# Altium PCB PCB1.PcbDoc
Units mm, origin at the board's own origin, x right, y up, seen from the top; angles counter-clockwise.
Board outline 50.01 x 50 mm, 2 copper layers (Top Layer, Bottom Layer); 82 components, 66 nets, 325 pads, 69 vias.
Unrouted connection lines stored in the file: 78.
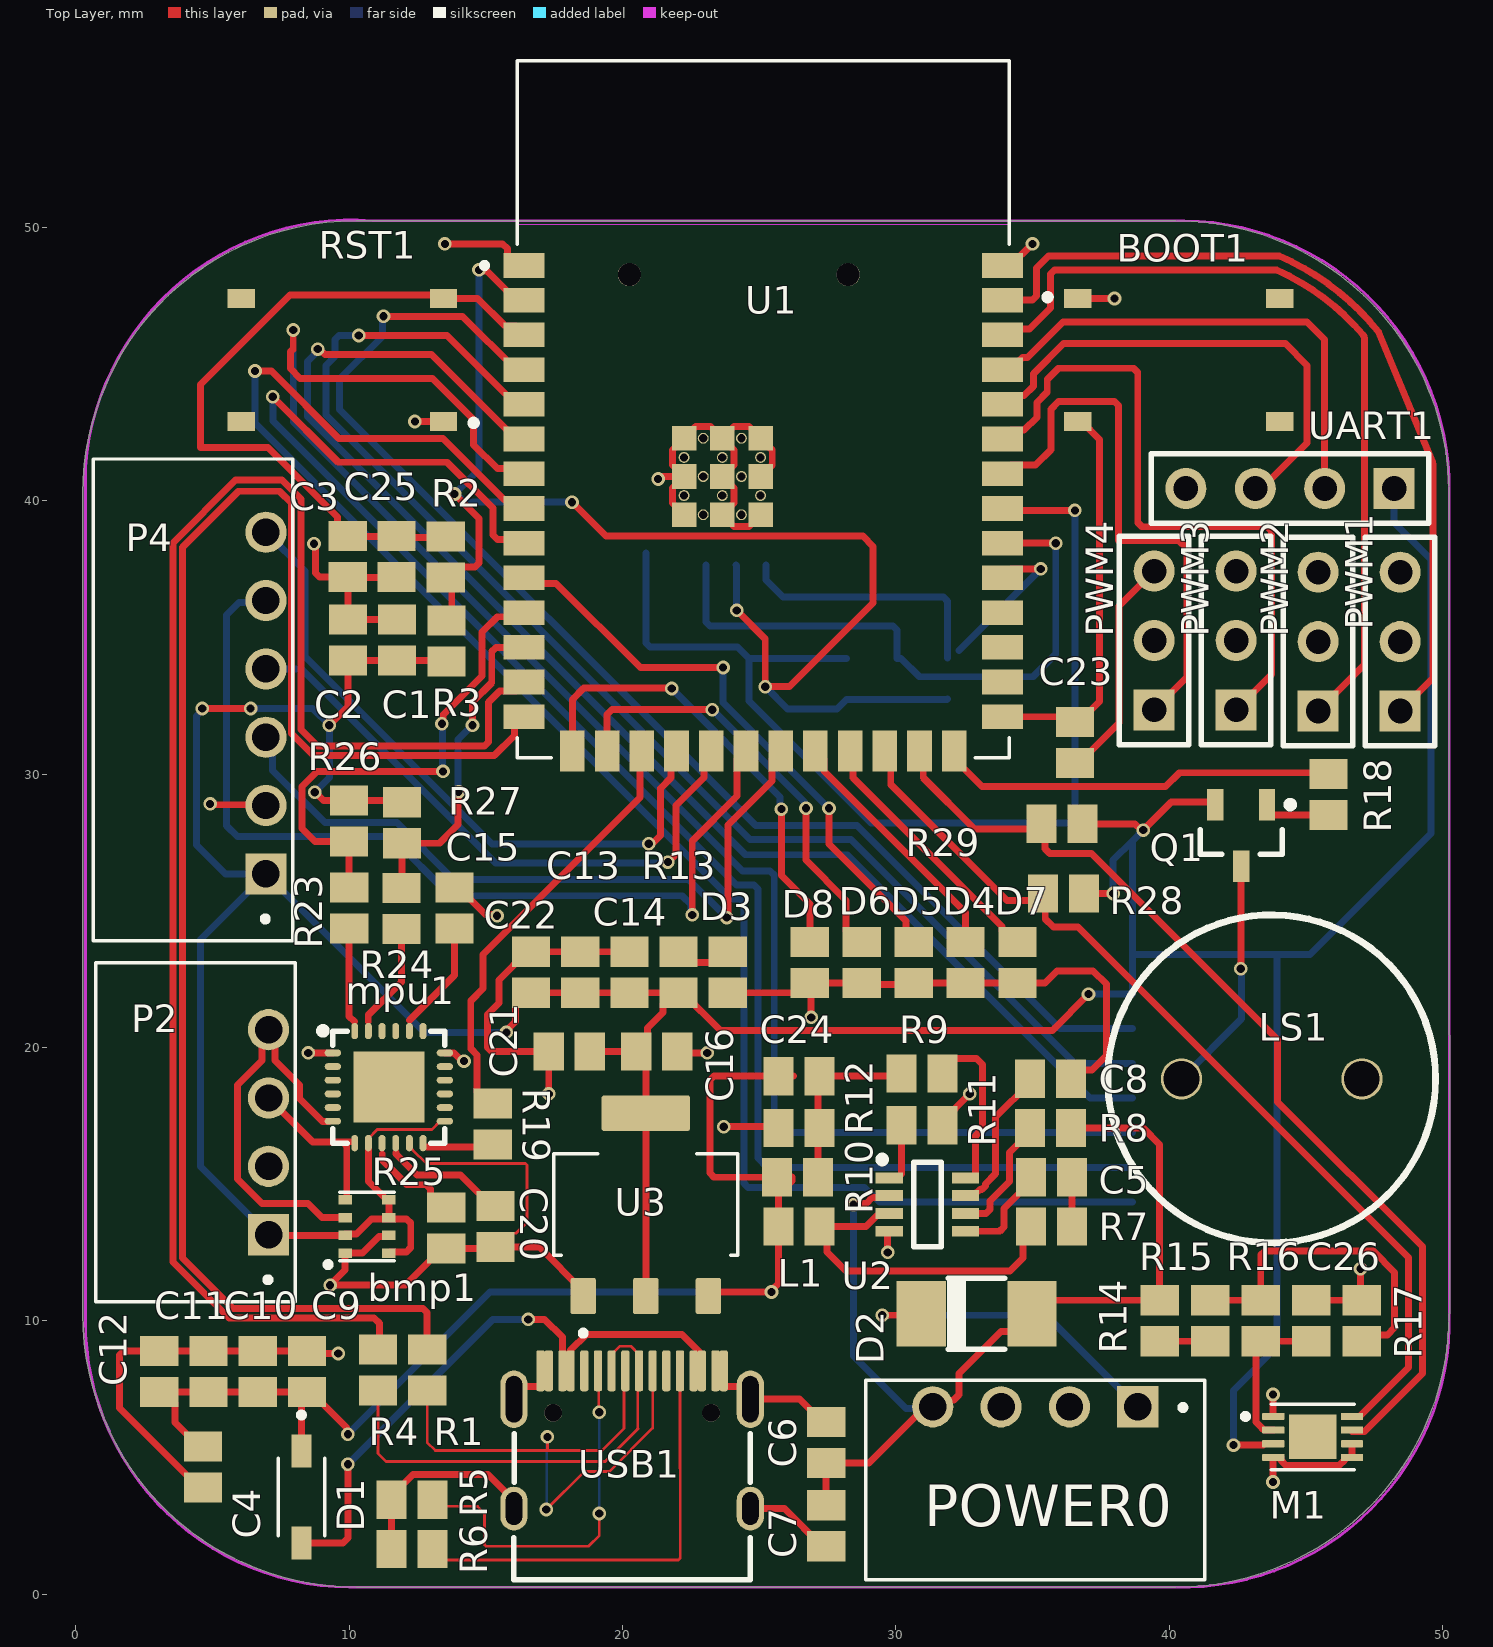
[diagram p0: Top Layer view]
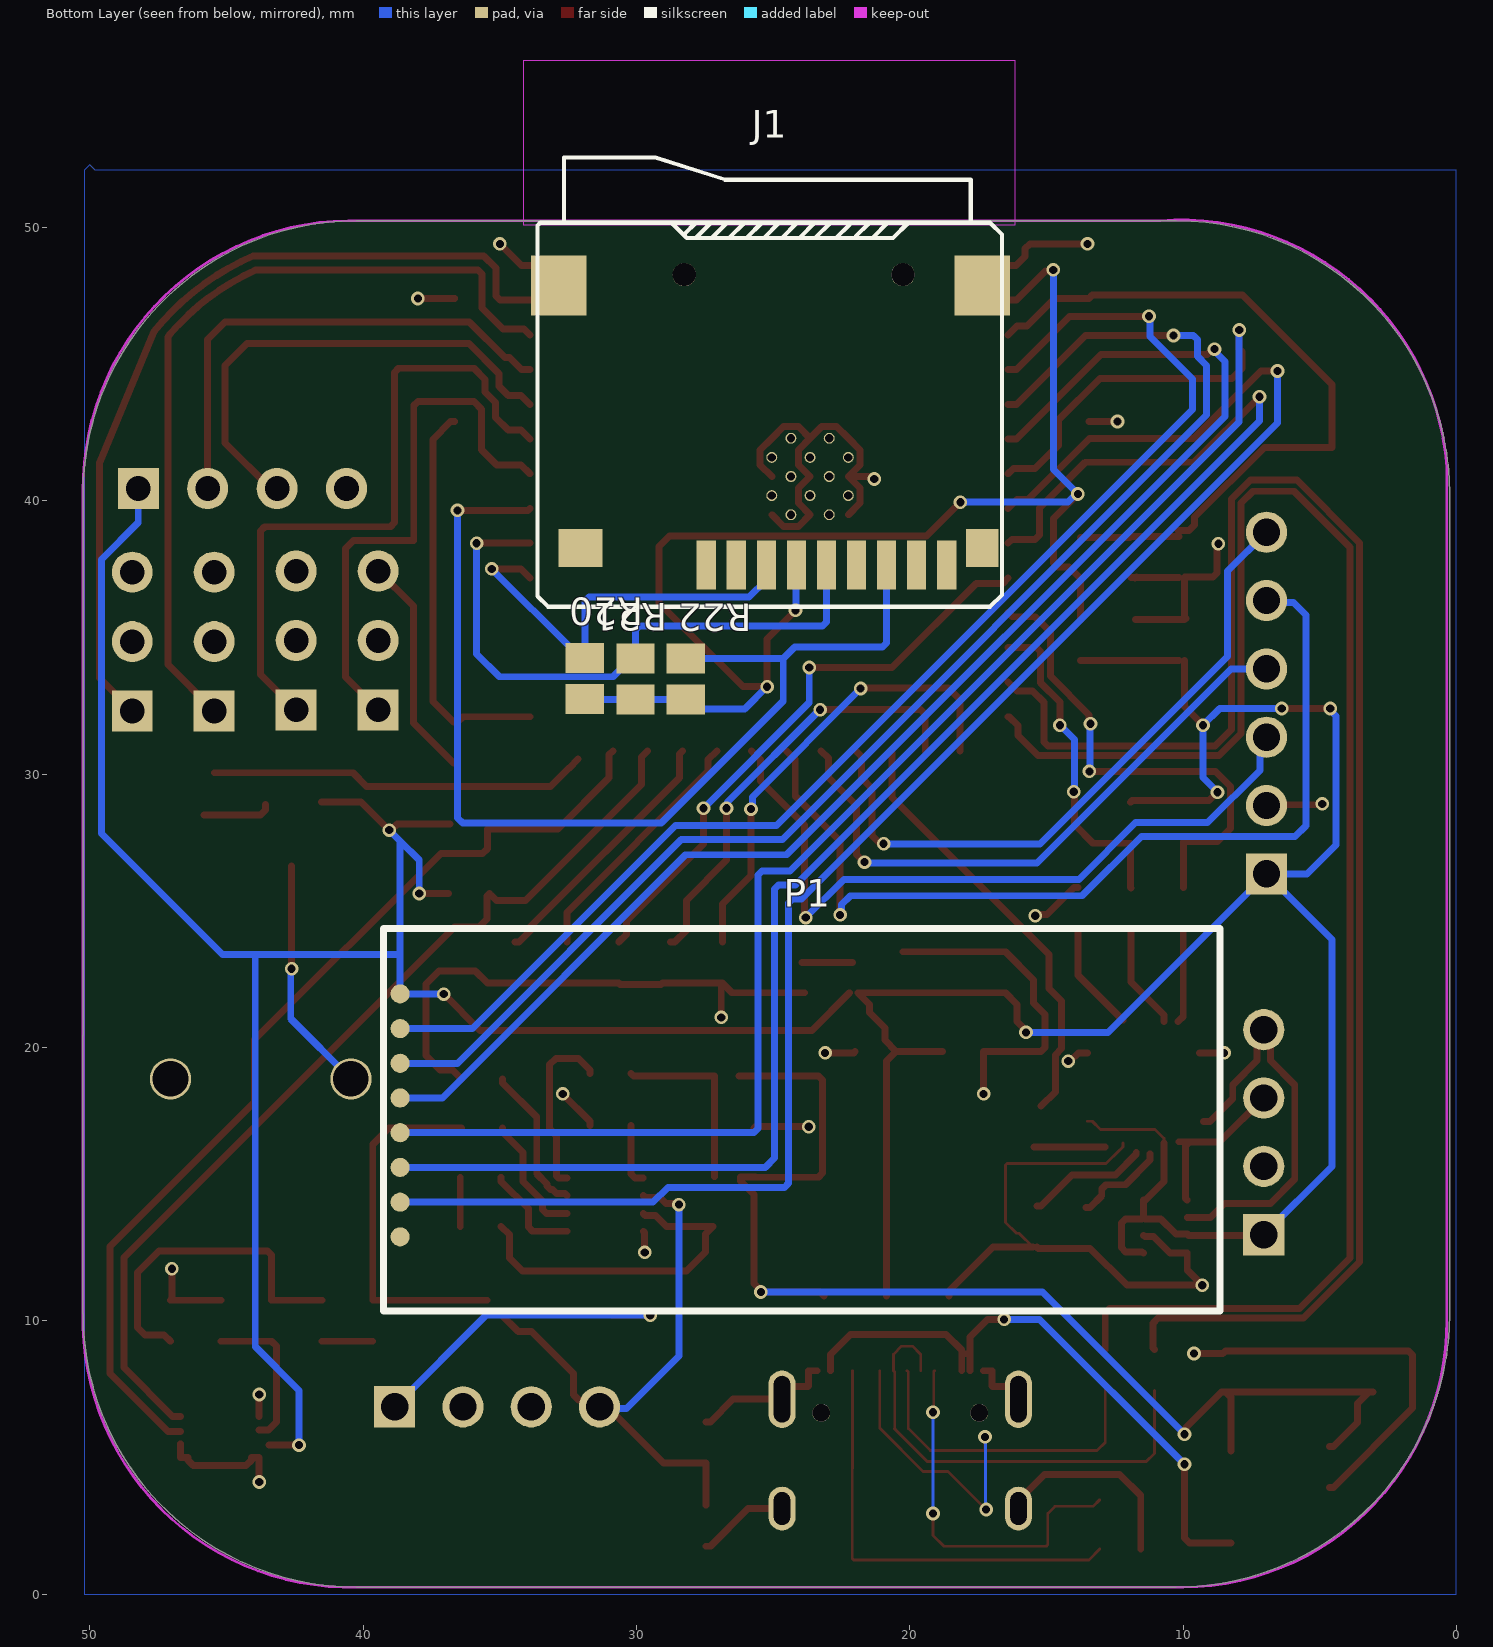
[diagram p1: Bottom Layer view, seen from below]

## Layer stack, top to bottom
Top Solder: solder mask 0.0102, Solder Resist, Dk 3.5
Top Layer: signal copper 0.0356
Dielectric 1: dielectric 0.32, FR-4, Dk 4.8
Bottom Layer: signal copper 0.0356
Bottom Solder: solder mask 0.0102, Solder Resist, Dk 3.5

## Board outline
0.25,10.25 0.25,40.25 cw(c10.25,40.25) 10.25,50.25 40.25,50.25 cw(c40.25,40.25) 50.25,40.25 50.25,20.44 50.26,20.44 50.26,10.252 50.25,10.25 cw(c40.25,10.25) 40.25,0.25 10.25,0.25 cw(c10.25,10.25)

## Design rules (kind name [scope] priority, off if disabled: settings)
Clearance [All] p1: gap=0.1 ignorepadtopadclearanceinfootprint=FALSE except(0.01: Arc-SMDPad Arc-THPad Arc-Hole Track-SMDPad Track-THPad Track-Hole SMDPad-SMDPad SMDPad-THPad)
DiffPairsRouting [All] p1: maxlimit=0.4 minlimit=0.3 mostfreqgap=0.3 toplayer_minwidth=0.381 toplayer_maxwidth=0.381 toplayer_prefwidth=0.381 bottomlayer_minwidth=0.381 bottomlayer_maxwidth=0.381 bottomlayer_prefwidth=0.381 maxuncoupledlength=12.7
MinimumSolderMaskSliver [All] p1: minsoldermaskwidth=0.01
PlaneConnect [All] p1: planeconnectstyle=Relief reliefexpansion=0.508 reliefentries=4 reliefconductorwidth=0.5 reliefairgap=0.5
PolygonConnect [All] p1: connectstyle=Relief reliefconductorwidth=0.5 reliefentries=4 polygonreliefangle="90 Angle" airgapwidth=0.5
RoutingVias [All] p1: holewidth=0.3 width=0.5 viastyle="Through Hole" minholewidth=0.3 minwidth=0.5 maxholewidth=0.3 maxwidth=0.5
SilkToSilkClearance [All] p1: silktosilkclearance=0
SilkToSolderMaskClearance [IsPad] p1: minsilkscreentomaskgap=0 clearancetoexposedcopper=TRUE
SolderMaskExpansion [IsVia] p1: expansion=0.102 istentingtop=TRUE
Width [All] p1: maxlimit=0.254 minlimit=0.1 preferedwidth=0.254 minimp=50.000000 maximp=50.000000 favimp=50.000000
25 further rules are at their usual default settings.

## Classes and differential pairs
component class Sheet2: AAAA bmp1 C15 C16 C20 C21 C22 D4 D5 D6 D7 D8 J1 LS1 mpu1 P1 P2 P4 PWM1 PWM2 PWM3 PWM4 Q1 R18 R19 R20 R21 R22 R23 R24 R25 R26 R27 UART1
component class Sheet1: AAAA BOOT1 C1 C2 C3 C4 C5 C6 C7 C8 C9 C10 C11 C12 C13 C14 C23 C24 C25 C26 D1 D2 D3 L1 M1 POWER0 R1 R2 R3 R4 R5 R6 R7 R8 R9 R10 R11 R12 R13 R14 R15 R16 R17 R28 R29 RST1 U1 U2 U3 USB1

## Components (designator, comment, footprint, x,y, rotation, side; value= is the part's Value field where it differs from the comment)
bmp1 "BMP280" "BMP280 LGA8" 10.65,13.45 r0 top
BOOT1 "SWITCH6*6*5" SWITCH6*6*5 40.35,45.15 r0 top
C1 "10uF/25v(20%)" C0805 11.75,34.9 r270 top
C2 "0.1uF/50V(10%)" C0805 9.95,34.9 r270 top
C3 "0.1uF/50V(10%)" C0805 9.94,37.96 r90 top value=1uF/16V(10%)
C4 "10uF/25V(20%)" C0805 4.65,4.65 r90 top
C5 "0.1uF/25V" C0805 35.7,15.25 r0 top
C6 "22uF/25V(20%)" C0805 27.45,5.55 r270 top
C7 "0.1uF/16V(10%)" C0805 27.45,2.5 r90 top
C8 "0.1uF/25V" C0805 35.65,18.85 r180 top
C9 "22uF/25V(20%)" C0805 8.45,8.15 r270 top
C10 "0.1uF/16V(10%)" C0805 6.65,8.15 r270 top
C11 "10uF/25V(20%)" C0805 4.85,8.15 r270 top
C12 "0.1uF/16V(10%)" C0805 3.05,8.15 r270 top
C13 "10uF/25V(20%)" C0805 18.45,22.75 r270 top
C14 "0.1uF/16V(10%)" C0805 20.25,22.75 r270 top
C15 "2.2nF" C0805 13.85,25.1 r270 top
C16 "0.1uF/16V(10%)" C0805 21.25,19.85 r180 top
C20 "0.1uF/16V(10%)" C0805 15.35,13.45 r90 top
C21 "10nF/16V(10%)" C0805 18.05,19.85 r0 top
C22 "0.1uF/16V(10%)" C0805 16.65,22.75 r90 top
C23 "0.1uF/16V(10%)" C0805 36.55,31.15 r90 top
C24 "33pF" C0805 26.45,18.95 r180 top
C25 "0.1uF/16V(10%)" C0805 11.726,37.964 r90 top
C26 "1uF/16V(10%)" C0805 45.2,10 r90 top
D1 "1N5819HW-7" SOD3715X145N 8.25,3.55 r270 top
D2 "SMAJ12CA" DO-214AC 32.95,10.25 r0 top
D3 "LED0" C0805 23.85,22.75 r270 top
D4 "LED0" C0805 32.55,23.1 r270 top
D5 "LED0" C0805 30.65,23.1 r270 top
D6 "LED0" C0805 28.75,23.1 r270 top
D7 "LED0" C0805 34.45,23.1 r270 top
D8 "LED0" C0805 26.85,23.1 r270 top
J1 "Micro SD" "MICRO SD" 17.35,47.877 r0 bottom
L1 "4.7uH" C0805 26.45,13.45 r180 top
LS1 "BUZZER" BEEPER 43.75,18.85 r0 top
M1 "MAX17040G" SON50P200X300X80-9N(MAX27040G+T) 45.25,5.75 r0 top
mpu1 "MPU-6050" "QFN24 4X4_N" 11.45,18.55 r0 top
P1 "NRF24" NRF24_LINE 38.65,17.55 r270 bottom
P2 "AUX" XH2.54-4P 8.025,16.9 r90 top
P4 "Header 6" XH2.54-6P 7.925,30.1 r90 top
POWER0 "SWD" XH2.54-4P 35.1,7.825 r180 top
PWM1 "Header 3" HDR1X3 48.45,32.31 r90 top
PWM2 "Header 3" HDR1X3 45.45,32.31 r90 top
PWM3 "Header 3" HDR1X3 42.45,32.35 r90 top
PWM4 "Header 3" HDR1X3 39.45,32.35 r90 top
Q1 "S8550" SOT-23B_N 42.63,27.76 r270 top
R1 "0(1%)" C0805 12.85,8.2 r90 top
R2 "10k(1%)" C0805 13.53,37.94 r270 top
R3 "0(1%)" C0805 13.555,34.872 r90 top
R4 "0(1%)" C0805 11.05,8.2 r90 top
R5 "5.1K" C0805 12.3,3.45 r0 top
R6 "5.1K" C0805 12.3,1.65 r0 top
R7 "20" C0805 35.7,13.45 r180 top
R8 "100K" C0805 35.65,17.05 r180 top
R9 "20K" C0805 30.95,19.05 r180 top
R10 "40.2K" C0805 26.4,15.25 r180 top
R11 "75K" C0805 30.95,17.15 r180 top
R12 "7.5K" C0805 26.45,17.05 r180 top
R13 "5.1K" C0805 22.05,22.75 r90 top
R14 "100K" C0805 39.65,10 r90 top
R15 "100K" C0805 41.5,10 r270 top
R16 "1K" C0805 43.35,10 r270 top
R17 "100K" C0805 47.05,10 r270 top
R18 "1K" C0805 45.83,29.26 r270 top
R19 "0(1%)" C0805 15.25,17.2 r90 top
R20 "10k(1%)" C0805 31.89,33.5 r270 bottom
R21 "10k(1%)" C0805 30.04,33.48 r270 bottom
R22 "10k(1%)" C0805 28.2,33.48 r270 bottom
R23 "0(1%)" C0805 9.996,25.1 r90 top
R24 "0(1%)" C0805 11.911,25.088 r90 top
R25 "4.7K" C0805 13.55,13.4 r270 top
R26 "1K(1%)" C0805 9.99,28.28 r270 top
R27 "1K(1%)" C0805 11.93,28.22 r90 top
R28 "1K(1%)" C0805 36.13,25.63 r0 top
R29 "1K(1%)" C0805 36.08,28.18 r0 top
RST1 "SWITCH6*6*5" SWITCH6*6*5 9.75,45.15 r180 top
U1 "ESP32-S3-WROOM-1" ESP32-S3-WROOM-1-N16R8 25.15,43.35 r0 top
U2 "DC MP2315" SOT23-8L 31.15,14.25 r270 top
U3 "AMS1117" SOT229P700X180-4N 20.85,14.25 r90 top
UART1 "Header 4" HDR1X4 48.23,40.45 r180 top
USB1 "Type-C" TYPE-C-TOP 20.35,5.65 r270 top

## Footprints (in the part's own frame and the unit in brackets; to place one, negate y for a bottom-side part, rotate by r counter-clockwise, add the part's x,y. Pads: shape width x height; smd on the part's side, far side on the other; paste and mask are expansions set on the pad)
BEEPER [mm]
  round 1.508 hole 1.3: 1(-3.3,0) 2(3.3,0)
  silkscreen extent -6,-6 6,6
"BMP280 LGA8" [mm]
  rect 0.5x0.35 smd: 1(-0.8,-0.975) 2(-0.8,-0.325) 3(-0.8,0.325) 4(-0.8,0.975) 5(0.8,0.975) 6(0.8,0.325) 7(0.8,-0.325) 8(0.8,-0.975)
  silkscreen extent -1.52,-1.5 1,1.25, body extent -1.03,-1.23 0.97,1.27, height 1
C0805 [mm] "Chip Capacitor, Body 2.0x1.3mm, IPC High Density"
  rect 1.1x1.4 smd: 1(-0.75,0) 2(0.75,0)
  body extent -1.1,-0.72 1.1,0.72, height 1.4
DO-214AC [mm]
  rect 1.8x2.4 smd: A(2.025,0) C(-2.025,0)
  silkscreen extent -1.06,-1.3 1.02,1.3
ESP32-S3-WROOM-1-N16R8 [mm]
  rect 1.5x0.9 smd: 1(-8.75,5.26) 2(-8.75,3.99) 3(-8.75,2.72) 4(-8.75,1.45) 5(-8.75,0.18) 6(-8.75,-1.09) 7(-8.75,-2.36) 8(-8.75,-3.63) 9(-8.75,-4.9) 10(-8.75,-6.17) 11(-8.75,-7.44) 12(-8.75,-8.71) 13(-8.75,-9.98) 14(-8.75,-11.25) 27(8.75,-11.25) 28(8.75,-9.98) 29(8.75,-8.71) 30(8.75,-7.44) 31(8.75,-6.17) 32(8.75,-4.9) 33(8.75,-3.63) 34(8.75,-2.36) 35(8.75,-1.09) 36(8.75,0.18) 37(8.75,1.45) 38(8.75,2.72) 39(8.75,3.99) 40(8.75,5.26)
  rect 0.9x1.5 smd: 15(-6.985,-12.5) 16(-5.715,-12.5) 17(-4.445,-12.5) 18(-3.175,-12.5) 19(-1.905,-12.5) 20(-0.635,-12.5) 21(0.635,-12.5) 22(1.905,-12.5) 23(3.175,-12.5) 24(4.445,-12.5) 25(5.715,-12.5) 26(6.985,-12.5)
  rect 0.9x0.9 smd: 41_1(-1.5,-2.46) 41_2(-2.9,-2.46) 41_3(-0.1,-2.46) 41_4(-2.9,-3.86) 41_5(-1.5,-3.86) 41_6(-0.1,-3.86) 41_7(-2.9,-1.06) 41_8(-1.5,-1.06) 41_9(-0.1,-1.06)
  round 0.4 hole 0.3 mask+0: 41_10(-1.5,-1.76) 41_11(-2.9,-1.76) 41_12(-0.1,-1.76) 41_13(-2.9,-3.16) 41_14(-1.5,-3.16) 41_15(-0.1,-3.16) 41_16(-2.2,-1.06) 41_17(-0.8,-1.06) 41_18(-2.2,-2.46) 41_19(-0.8,-2.46) 41_20(-2.2,-3.86) 41_21(-0.8,-3.86)
  Keep-Out Layer region: 9,6.75 -9,6.75 -9,12.75 9,12.75
  Keep-Out Layer region: 9,6.75 -9,6.75 -9,12.75 9,12.75
  silkscreen extent -10.3,-12.75 9,12.75
HDR1X3 [mm] "Connector; Header; 3 Position"
  rect 1.5x1.5 hole 0.9: 1(0,0)
  round 1.5 hole 0.9: 2(2.54,0) 3(5.08,0)
  silkscreen extent -1.27,-1.27 6.35,1.27
HDR1X4 [mm] "Connector; Header; 4 Position"
  rect 1.5x1.5 hole 0.9: 1(0,0)
  round 1.5 hole 0.9: 2(2.54,0) 3(5.08,0) 4(7.62,0)
  silkscreen extent -1.27,-1.27 8.89,1.27
"MICRO SD" [mm]
  rect 2.032x2.2 smd: 0(0,0) 0(15.5,0)
  rect 1.2x1.4 smd: 0(0,9.6)
  round 0.85 hole 0.85 unplated: 0(2.9,-0.4) 0(10.9,-0.4)
  rect 1.6x1.4 smd: 0(14.7,9.6)
  rect 0.7x1.8 smd: 1(10.1,10.227) 2(9,10.227) 3(7.9,10.227) 4(6.8,10.227) 5(5.7,10.227) 6(4.6,10.227) 7(3.5,10.227) 8(2.4,10.227) 9(1.3,10.227)
  silkscreen extent -0.72,-4.68 16.27,11.75, body extent -0.27,-4.63 16,10.57, height 1.8
NRF24_LINE [mm]
  round 0.7 smd: 1(-4.41,0) 2(-3.14,0) 3(-1.87,0) 4(-0.6,0) 5(0.67,0) 6(1.94,0) 7(3.21,0) 8(4.48,0)
  silkscreen extent -6.8,-0.6 7.2,30
"QFN24 4X4_N" [mm]
  rect 2.6x2.6 smd: 0(0,0)
  oval 0.6x0.25 smd: 1(-2.05,1.25) 2(-2.05,0.75) 3(-2.05,0.25) 4(-2.05,-0.25) 5(-2.05,-0.75) 6(-2.05,-1.25) 13(2.05,-1.25) 14(2.05,-0.75) 15(2.05,-0.25) 16(2.05,0.25) 17(2.05,0.75) 18(2.05,1.25)
  oval 0.25x0.6 smd: 7(-1.25,-2.05) 8(-0.75,-2.05) 9(-0.25,-2.05) 10(0.25,-2.05) 11(0.75,-2.05) 12(1.25,-2.05) 19(1.25,2.05) 20(0.75,2.05) 21(0.25,2.05) 22(-0.25,2.05) 23(-0.75,2.05) 24(-1.25,2.05)
  silkscreen extent -2.54,-2.05 2.05,2.18, body extent -2.02,-2.02 2.02,2.02, height 0.88
SOD3715X145N [mm]
  rect 1.21x0.73 smd: A(1.68,0) C(-1.68,0)
  silkscreen extent -3.1,-0.85 1.43,0.85, body extent -1.83,-0.77 1.83,0.77, height 0.8
SON50P200X300X80-9N(MAX27040G+T) [mm]
  rrect25% 0.82x0.26 smd: 1(-1.44,0.75) 2(-1.44,0.25) 3(-1.44,-0.25) 4(-1.44,-0.75) 5(1.44,-0.75) 6(1.44,-0.25) 7(1.44,0.25) 8(1.44,0.75)
  rect 1.75x1.63 smd paste-2: 9(0,0)
  silkscreen extent -2.56,-1.2 1.53,1.2
SOT23-8L [mm]
  rect 0.4x1 smd: 1(-0.975,-1.397) 2(-0.325,-1.397) 3(0.325,-1.397) 4(0.975,-1.397) 5(0.975,1.397) 6(0.325,1.397) 7(-0.325,1.397) 8(-0.975,1.397)
  silkscreen extent -1.77,-1.78 1.55,0.51, body extent -1.5,-1.4 1.5,1.4, height 1.15
SOT229P700X180-4N [mm]
  rrect15% 1.31x0.93 smd: 1(-3.345,2.29) 2(-3.345,0) 3(-3.345,-2.29)
  rrect15% 1.31x3.24 smd: 4(3.345,0)
  silkscreen extent -4.8,-3.36 1.86,3.36
SOT-23B_N [mm] "SOT23, 3-Leads, Body 2.9x1.3mm, Pitch 0.95mm, Lead Span 2.4mm, IPC Medium Density"
  rect 1.15x0.6 smd: 1(-1.125,0.95) 2(-1.125,-0.95) 3(1.125,0)
  silkscreen extent -1.25,-1.5 0.7,1.93, body extent -0.7,-1.5 0.7,1.5, height 1.14
SWITCH6*6*5 [mm]
  rect 1x0.7 smd: 1(-3.7,2.25) 2(3.7,2.25) 3(-3.7,-2.25) 4(3.7,-2.25)
  silkscreen extent -4.9,2.2 -4.7,2.4, body extent -3,-3.07 3,2.95, height 4.5
TYPE-C-TOP [mm]
  round 0.65 hole 0.65: 0(-0.98,2.89) 0(-0.98,-2.89)
  oval 1.6x1 hole 0.6 slot 1.2 at 0 deg: 1(2.52,4.325) 2(2.52,-4.325)
  oval 2.1x1 hole 0.6 slot 1.7 at 0 deg: 3(-1.48,-4.325) 4(-1.48,4.325)
  rrect50% 1.5x0.3 smd: A1(-2.52,-3.35) A4(-2.52,-2.55) A5(-2.52,-1.25) A6(-2.52,-0.25) A7(-2.52,0.25) A8(-2.52,1.25) A9(-2.52,2.55) A12(-2.52,3.35) B1(-2.52,3.05) B4(-2.52,2.25) B5(-2.52,1.75) B6(-2.52,0.75) B7(-2.52,-0.75) B8(-2.52,-1.75) B9(-2.52,-2.25) B12(-2.52,-3.05)
  silkscreen extent -0.22,-4.33 5.12,4.33, body extent -2.57,-4.48 5.18,4.48, height 3.26
XH2.54-4P [mm]
  rect 1.508x1.508 hole 1: 1(-3.75,0.975)
  round 1.508 hole 1: 2(-1.25,0.975) 3(1.25,0.975) 4(3.75,0.975)
  silkscreen extent -6.2,0 6.2,7.3
XH2.54-6P [mm]
  rect 1.508x1.508 hole 1: 1(-3.75,0.975)
  round 1.508 hole 1: 2(-1.25,0.975) 3(1.25,0.975) 4(3.75,0.975) 5(6.25,0.975) 6(8.75,0.975)
  silkscreen extent -6.2,0 11.43,7.3

## Part data
bmp1: "气压传感器"
C1 C2 C3 C4 C5 C6 C7 C8 C9 C10 C11 C12 C13 C14 C15 C16 C20 C21 C22 C23 C24 C25 C26: library part Cap, "Capacitor", LatestRevisionDate=17-Jul-2002, LatestRevisionNote="Re-released for DXP Platform.", PackageDescription="Radial Cap, Thru-Hole; 2 Leads; 0.3 in Pin Spacing", PackageReference=RAD-0.3, Published=8-Jun-2000, Publisher="Altium Limited"
D1: "Diode Schottky 40 V 1A Surface Mount SOD-123", Package="SOD-123 Fairchild Semiconductor", Availability="In Stock", Check_prices=https://www.snapeda.com/parts/1N5819HW-7/Diodes+Inc./view-part/?ref=eda, MF="Diodes Inc.", MP=1N5819HW-7, Price=None, Purchase-URL=https://pricing.snapeda.com/search/part/1N5819HW-7/?ref=eda, SnapEDA_Link=https://www.snapeda.com/parts/1N5819HW-7/Diodes+Inc./view-part/?ref=snap
D2: "19.9V Clamp 20.1A Ipp Tvs Diode Surface Mount SMAJ _DO-214AC_", Package="DO-214AC-214 Taiwan Semiconductor", Availability=Unavailable, MF="Taiwan Semiconductor", MP=SMAJ12CA, Price=None, SnapEDA_Link=https://www.snapeda.com/parts/SMAJ12CA/Taiwan%20Semiconductor/view-part/2769109/?ref=snap
D3 D4 D5 D6 D7 D8: "Typical INFRARED GaAs LED", LatestRevisionDate=08-Jul-2005, LatestRevisionNote="Mech Layer 1 removed.", PackageDescription="LED; 2 Leads", PackageReference=LED-0, Published=8-Jun-2000, Publisher="Altium Limited"
J1: "Micro SD卡", BOM名称="Micro SD卡", 学习资源=www.ooocke.com, 版权归属=源创客
L1: library part L-NR, "NR功率电感", BOM名称=NR功率电感, 学习资源=www.ooocke.com, 版权归属=源创客
LS1: library part Bell, "Electrical Bell", LatestRevisionDate=17-Jul-2002, LatestRevisionNote="Re-released for DXP Platform.", PackageReference=PIN2, Published=24-Mar-1999, Publisher="Altium Limited"
M1: "电量检测"
mpu1: "传感器", Package=QFN-24_4x4x05P, SuppliersPartNumber=C24112, ComponentLink1Description=供应商链接, ComponentLink1URL=http://www.szlcsc.com/product/details_24852.html, Supplier=LC
P1: library part "Header 8", "Header, 8-Pin", LatestRevisionDate=17-Jul-2002, LatestRevisionNote="Re-released for DXP Platform.", Publisher="Altium Limited"
P2: library part "Header 4", "Header, 4-Pin", LatestRevisionDate=17-Jul-2002, LatestRevisionNote="Re-released for DXP Platform.", Publisher="Altium Limited"
P4: "Header, 6-Pin", LatestRevisionDate=17-Jul-2002, LatestRevisionNote="Re-released for DXP Platform.", Publisher="Altium Limited"
POWER0: library part "Header 4", "4P接插件", BOM名称=4P接插件, 学习资源=www.ooocke.com, 版权归属=源创客
PWM1 PWM2 PWM3 PWM4: "Header, 3-Pin", LatestRevisionDate=17-Jul-2002, LatestRevisionNote="Re-released for DXP Platform.", Publisher="Altium Limited"
Q1: library part PNP, "PNP Bipolar Transistor", LatestRevisionDate=29-May-2009, LatestRevisionNote="IPC-7351 Footprint Added.", PackageDescription="3-Pin SOT-23 Package 0.95 mm Pitch, 2.4 mm Lead Span", PackageReference=SOT-23B, PackageVersion=Aug-1999, Published=8-Jun-2000, Publisher="Altium Limited"
R1 R2 R3 R4 R5 R6 R7 R8 R9 R10 R11 R12 R13 R14 R15 R16 R17 R18 R19 R20 R21 R22 R23 R24 R25 R26 R27 R28 R29: library part Res1, "Resistor", LatestRevisionDate=17-Jul-2002, LatestRevisionNote="Re-released for DXP Platform.", PackageDescription="Axial Device, Thru-Hole; 2 Leads; 0.3 in Pin Spacing", PackageReference=AXIAL-0.3, Published=8-Jun-2000, Publisher="Altium Limited"
U1: "Bluetooth, WiFi 802.11b/g/n, Bluetooth v5.0 Transceiver Module 2.4GHz PCB Trace Surface Mount", Package=None, Availability="In Stock", Check_prices=https://www.snapeda.com/parts/ESP32-S3-WROOM-1-N8R8/Espressif+Systems/view-part/?ref=eda, MF="Espressif Systems", MP=ESP32-S3-WROOM-1-N8R8, Price=None, Purchase-URL=https://pricing.snapeda.com/search/part/ESP32-S3-WROOM-1-N8R8/?ref=eda, SnapEDA_Link=https://www.snapeda.com/parts/ESP32-S3-WROOM-1-N8R8/Espressif+Systems/view-part/?ref=snap
U2: "DC降压芯片"
U3: "UNO PLUS Arduino R3 Shield, Xbee Arduino IDE Wheeled Robotics Kit", Package="SOT-223 Seeed Technology", Availability=Unavailable, MF="Seeed Technology", MP=AMS1117, Price=None, SnapEDA_Link=https://www.snapeda.com/parts/AMS1117/Seeed%20Technology%20Co.%2C%20Ltd/view-part/184428/?ref=snap
UART1: "Header, 4-Pin", LatestRevisionDate=17-Jul-2002, LatestRevisionNote="Re-released for DXP Platform.", Publisher="Altium Limited"
USB1: library part USB-Type-C-TOP

## Via types
v1: diameter 0.5, hole 0.3, Top Layer to Bottom Layer, tented both sides, 69 vias

## Nets (pads, with @x,y where several pads share a name; then routed paths per layer and width w, separated by ;. In a path a pad name is that pad's centre, name@x,y a point inside that pad or via, vN(x,y) a via of type N, cw(c..) or ccw(c..) an arc to the next point about the centre after c; other vN are vias at no path point)
AUX_CL: bmp1.4 mpu1.7 P2.3 | length 6
  Top Layer w0.254: P2.3 8.665,16.535 9.765,16.535 ; bmp1.4 9.859,14.425 9.907,14.473 9.907,16.393 9.765,16.535 ; mpu1.7@10.15,16.55 9.75,16.55 9.765,16.535
AUX_DA: bmp1.3 mpu1.6 P2.4 | length 14.9
  Top Layer w0.254: mpu1.6@9.25,17.294 9.015,17.294 8.185,18.124 8.185,18.624 7.29,19.519 7.29,20.41 P2.4 6.81,20.41 6.81,19.515 5.915,18.62 5.915,15.18 6.81,14.285 8.487,14.285 8.997,13.775 bmp1.3
BUZZER: R18.1 U1.26 | length 13.9
  Top Layer w0.254: U1.26@32.135,30.558 32.135,30.55 32.458,30.227 32.474,30.227 33.151,29.55 39.871,29.55 40.371,30.05 R18.1@45.45,30.05
CHIP_PU: C3.2 C25.2 R2.1 RST1.3 U1.3 | length 26.8
  Top Layer w0.254: C3.2@10.15,38.7 11.9,38.7 11.95,38.65 R2.1@13.75,38.65 ; C3.2@10.184,38.916 9.784,38.916 9.577,39.123 9.577,39.401 7.02,41.958 4.55,41.958 4.55,44.25 7.824,47.524 13.326,47.524 RST1.3 14.7,47.4 15.707,46.393 16.077,46.393 U1.3
ESP3.3: J1.4 R2.2 R3.2 R20.2 R21.2 R22.2 U1.2 | length 51.8
  Top Layer w0.254: R3.2@13.75,35.65 13.75,37.15 14.173,37.573 14.601,37.573 14.75,37.722 14.75,39.35 v1(13.85,40.25) ; v1(14.75,48.45) 14.797,48.403 15.037,48.403 16.1,47.34 U1.2 ; v1(18.15,39.95) 19.391,38.709 28.791,38.709 29.169,38.331 29.169,36.269 26.1,33.2 v1(25.22,33.2) 25.22,34.95 v1(24.18,35.99)
  Bottom Layer w0.254: v1(14.75,48.45) 14.75,41.15 v1(13.85,40.25) 13.917,40.25 14.217,39.95 v1(18.15,39.95) ; J1.4 24.165,37.635 24.165,36.005 v1(24.18,35.99) ; v1(25.22,33.2) 26.04,32.38 27.85,32.38 R22.2 R21.2 31.87,32.73 R20.2
GND: bmp1.1 bmp1.7 BOOT1.1 C1.1 C2.1 C3.1 C4.1 C6.1 C7.1 C8.1 C9.1 C10.1 C11.1 C12.1 C13.1 C14.1 C15.1 C16.1 C20.1 C21.1 C22.2 C23.1 C25.1 C26.2 D2.C D3.2 D4.2 D5.2 D6.2 D7.2 D8.2 J1.6 J1.9 LS1.2 M1.1 M1.4 M1.5 M1.6 mpu1.1 mpu1.11 mpu1.18 P1.8 P2.2 P4.2 POWER0.1 PWM1.3 PWM2.3 PWM3.3 PWM4.3 R5.1 R6.1 R11.1 R12.2 R17.1 R25.2 RST1.1 U1.1 U1.40 U1.41_1 U1.41_2 U1.41_3 U1.41_4 U1.41_5 U1.41_6 U1.41_7 U1.41_8 U1.41_9 U2.4 U3.1 UART1.4 USB1.1 USB1.2 USB1.3 USB1.4 USB1.A1 USB1.A12 USB1.B1 USB1.B12 | length 156.3
  Top Layer w0.1: mpu1.11 12.2,16.366 12.312,16.254 12.318,16.254 12.822,15.75 16.441,15.75 16.5,15.691 16.5,13.6 16.1,13.2 16,13.2 15.5,12.7 C20.1
  Top Layer w0.254: C4.1 4.5,3.9 1.6,6.8 1.6,8.751 1.749,8.9 C12.1 C11.1 C10.1 C9.1 8.55,8.8 v1(9.6,8.8) ; v1(4.91,28.91) 4.94,28.88 6.92,28.88 P4.2 ; v1(8.5,19.8) mpu1.1 ; v1(8.71,38.43) 8.757,38.383 8.757,37.359 8.906,37.21 C3.1 ; C2.1@9.9,35.7 C2.1 ; C3.1@9.95,37.2 C2.1 ; C3.1@10.15,37.2 C25.1@11.9,37.2 ; bmp1.7 11.402,13.077 11.083,13.077 10.481,12.475 bmp1.1 9.85,11.85 v1(9.3,11.3) 12.05,11.3 13.4,12.65 R25.2 15.3,12.65 C20.1 ; R6.1 R5.1 11.55,3.6 12.327,4.377 15.078,4.377 16.025,3.43 USB1.2 ; C25.1@11.71,37.22 C25.1@11.76,37.17 ; C1.1 C2.1 ; v1(12.4,42.9) 13.1,42.9 RST1.1 ; mpu1.18 13.502,19.798 13.835,19.798 14.133,19.5 v1(14.2,19.5) ; v1(13.5,49.4) 15.61,49.4 15.785,49.225 15.785,48.933 16.108,48.61 U1.1 ; C15.1 14,25.85 14.983,24.867 15.363,24.867 v1(15.41,24.82) ; C20.1@15.5,12.7 16.955,12.7 18.56,11.095 U3.1 ; USB1.3 16.025,7.243 16.37,7.587 16.977,7.587 17,7.61 USB1.A1 USB1.B12 ; v1(17.3,18.3) C21.1 15.199,19.85 15.05,19.999 15.05,21.2 15.473,21.623 15.473,22.473 16.5,23.5 C22.2 C13.1 C14.1 ; v1(21.3,40.8) 21.367,40.8 21.457,40.89 U1.41_2 ; C16.1 22.05,19.8 v1(23.1,19.8) ; U1.41_4 21.823,39.917 21.823,40.463 U1.41_2 ; USB1.B1 USB1.A12 23.7,7.61 23.723,7.587 24.33,7.587 24.675,7.243 USB1.4 26.47,7.13 27.3,6.3 C6.1 ; v1(23.7,17.1) 25.65,17.1 R12.2 ; D3.2 26.5,22 D8.2 ; USB1.1 25.92,3.13 27.3,1.75 C7.1 ; U1.41_6 24.623,39.063 24.077,39.063 U1.41_5 24.077,39.917 24.077,40.463 U1.41_1 24.077,41.317 24.077,41.863 U1.41_8 ; U1.41_3 25.477,41.317 25.477,41.863 U1.41_9 24.623,42.717 24.077,42.717 U1.41_8 ; v1(26.9,21.1) 26.9,22.3 D8.2 ; v1(29.5,10.2) 30.875,10.2 D2.C ; v1(29.7,12.5) 29.7,13.222 U2.4 ; R11.1 31.7,17.3 v1(32.7,18.3) ; U1.40 34.2,48.61 34.99,49.4 v1(35,49.4) ; C8.1 36.732,19.182 37.182,19.182 37.7,19.7 37.7,22.319 37.219,22.8 35.9,22.8 35.45,22.35 D7.2 D4.2 D5.2 30.6,22.3 29.1,22.3 29.05,22.35 D6.2 D8.2 ; C23.1 36.7,30.4 38.167,31.867 38.167,36.147 PWM4.3 ; BOOT1.1 v1(38,47.4) ; v1(43.8,4.1) 43.805,4.105 43.805,4.997 43.808,5 M1.4 44.09,5 44.093,4.997 44.093,4.896 44.281,4.708 46.219,4.708 46.407,4.896 46.407,4.997 46.41,5 M1.5 M1.6 ; v1(43.8,7.3) 43.805,7.295 43.805,6.503 43.808,6.5 M1.1 ; C26.2 R17.1 47,10.8 v1(47,11.9) ; U1.41_2 21.823,41.317 21.823,41.863 U1.41_7 22.677,42.717 23.223,42.717 U1.41_8
  Bottom Layer w0.254: v1(29.5,10.2) 35.5,10.2 POWER0.1
GPIO0: BOOT1.3 C23.2 U1.27 | length 14.6
  Top Layer w0.254: U1.27 36.35,32.1 C23.2 36.7,31.9 37.45,32.65 37.45,42.25 36.8,42.9 BOOT1.3
GPIO19: R4.2 U1.13 | length 60.4
  Top Layer w0.254: R4.2 11.101,9.001 11.101,9.908 10.913,10.096 5.603,10.096 3.546,12.153 3.546,38.464 5.84,40.758 7.543,40.758 8.233,40.068 8.233,31.637 8.84,31.03 14.941,31.03 15.09,31.179 15.09,32.63 15.507,33.047 16.077,33.047 U1.13
GPIO20: R1.2 U1.14 | length 60.2
  Top Layer w0.254: R1.2 12.85,10.301 12.701,10.45 5.75,10.45 3.9,12.3 3.9,38.3 5.95,40.35 7.45,40.35 7.879,39.921 7.879,31.49 8.693,30.676 9.454,30.676 15.306,30.676 16.048,31.418 16.048,31.777 16.371,32.1 U1.14
LEDIO14: D4.1 U1.22 | length 9.3
  Top Layer w0.254: U1.22 27.378,30.527 27.378,30.114 32.55,24.942 D4.1
LEDIO17: D5.1 U1.10 | length 21.6
  Top Layer w0.254: U1.10 16.6,36.98 17.57,36.98 20.65,33.9 v1(23.68,33.9) ; v1(27.55,28.75) 27.55,27.45 30.368,24.632 30.368,24.132 D5.1
  Bottom Layer w0.254: v1(23.68,33.9) 23.68,32.62 v1(27.55,28.75)
LEDIO18: D6.1 U1.16 | length 16.1
  Top Layer w0.254: U1.16 19.435,32.185 19.61,32.36 23.279,32.36 v1(23.283,32.355) ; v1(26.71,28.75) 26.71,26.85 28.177,25.383 28.177,24.273 28.6,23.85 D6.1
  Bottom Layer w0.254: v1(23.283,32.355) 23.295,32.355 26.663,28.987 26.663,28.797 v1(26.71,28.75)
LEDIO21: D7.1 U1.23 | length 9.6
  Top Layer w0.254: U1.23 28.432,30.743 28.432,29.868 33.877,24.423 33.877,24.273 34.3,23.85 D7.1
LEDIO46: D8.1 U1.15 | length 17.1
  Top Layer w0.254: U1.15 18.165,32.735 18.58,33.15 21.78,33.15 v1(21.8,33.13) ; v1(25.81,28.72) 25.81,26.289 26.85,25.249 D8.1
  Bottom Layer w0.254: v1(21.8,33.13) 25.763,29.167 25.763,28.767 v1(25.81,28.72)
M_D_INT: R19.2 U1.17 | length 15.9
  Top Layer w0.254: R19.2@15.2,17.85 14.677,18.373 14.677,19.722 14.446,19.953 14.446,21.7 14.9,22.154 14.9,23.4 20.644,29.144 20.644,30.789 U1.17
M_D_SCL: R24.2 R27.1 U1.12 | length 12.1
  Top Layer w0.254: R24.2 11.93,25.857 R27.1 13.3,27.47 13.98,28.15 13.98,29.33 v1(14.002,29.352) ; v1(14.51,31.79) 14.51,32.64 15.214,33.344 15.214,34.491 15.363,34.64 U1.12
  Bottom Layer w0.254: v1(14.002,29.352) 13.98,29.375 13.98,31.26 v1(14.51,31.79)
M_D_SDA: R23.2 R26.2 U1.11 | length 18.1
  Top Layer w0.254: R23.2 9.99,25.856 R26.2 8.739,27.53 8.263,28.006 8.263,29.543 8.82,30.1 v1(13.43,30.1) ; v1(13.39,31.84) 13.437,31.887 13.437,32.167 14.86,33.59 14.86,35.2 15.418,35.758 16.248,35.758 U1.11
  Bottom Layer w0.254: v1(13.39,31.84) 13.41,31.82 13.41,30.12 v1(13.43,30.1)
MAX_SCL: M1.7 R29.1 U1.25 | length 36.3
  Top Layer w0.254: U1.25 31.002,30.713 31.002,29.868 32.88,27.99 35.46,27.99 35.46,27.27 35.63,27.1 37.155,27.1 43.97,20.285 43.97,18.01 49.266,12.714 49.266,8.078 47.142,5.954 M1.7@46.69,5.954
MAX_SDA: M1.8 R28.1 U1.24 | length 34.9
  Top Layer w0.254: U1.24 29.812,30.633 29.812,29.628 34.06,25.38 35.13,25.38 R28.1@35.305,25.555 ; R28.1 35.466,25.544 35.466,24.698 35.76,24.404 36.662,24.404 48.758,12.308 48.758,8.288 46.97,6.5 M1.8
MPU_INT: mpu1.12 R19.1 | length 2.6
  Top Layer w0.254: 12.85,16.35 R19.1@15.45,16.35
MPU_SCL: mpu1.23 R24.1 | length 3.9
  Top Layer w0.254: 10.694,20.95 10.694,21.184 11.911,22.401 R24.1
MPU_SDA: mpu1.24 R23.1 | length 3.5
  Top Layer w0.254: R23.1 9.996,21.135 10.186,20.944
NetC5_1: C5.1 U2.5 | length 3.7
  Top Layer w0.254: U2.5 33.801,13.275 33.95,13.424 33.95,14.1 34.95,15.1 C5.1
NetC5_2: C5.2 R7.1 | length 1.8
  Top Layer w0.254: R7.1 C5.2
NetC8_2: C8.2 U2.7 | length 5.5
  Top Layer w0.254: U2.7 32.62,14.648 32.92,14.648 33.07,14.798 33.141,14.798 33.274,14.931 33.274,15.002 33.65,15.378 33.65,17.45 34.9,18.7 C8.2
NetC15_2: C15.2 mpu1.20 | length 4
  Top Layer w0.254: 12.205,20.995 13.85,22.641 C15.2
NetC20_2: C20.2 mpu1.10 | length 4.5
  Top Layer w0.254: 11.716,16.15 11.716,16.093 12.48,15.33 14.07,15.33 15.2,14.2 C20.2
NetC24_1: C24.1 R9.2 R10.1 R12.1 | length 6.8
  Top Layer w0.254: R10.1@27.15,15.267 27.15,18.95 30.1,18.95 R9.2
NetC26_1: C26.1 M1.2 R16.2 | length 5.6
  Top Layer w0.254: M1.2@43.441,6.027 43.325,6.143 43.173,6.295 43.173,9.073 R16.2 C26.1 ; M1.2@43.441,6.027 43.466,6.003 43.807,6.003 M1.2
NetD3_1: D3.1 R13.2 | length 1.9
  Top Layer w0.254: R13.2@22.102,23.107 23.943,23.107 D3.1@23.95,23.1
NetL1_1: L1.1 R7.2 U2.3 | length 12.7
  Top Layer w0.254: U2.3 29.68,13.852 29.309,13.852 28.907,13.45 L1.1 27.482,13.168 27.482,12.518 28.177,11.823 34.174,11.823 34.65,12.299 34.65,13.15 R7.2
NetLS1_1: LS1.1 Q1.3 | length 8.7
  Top Layer w0.254: v1(42.62,22.88) 42.625,22.885 42.625,26.63 Q1.3
  Bottom Layer w0.254: LS1.1 42.65,21.05 42.65,22.85 v1(42.62,22.88)
Netmpu1_9: mpu1.9 R25.1 | length 3.4
  Top Layer w0.254: 11.208,16.109 11.208,15.883 12.115,14.976 12.828,14.976 12.977,14.827 12.977,14.573 13.4,14.15 R25.1
NetQ1_1: Q1.1 R18.2 | length 2.5
  Top Layer w0.254: Q1.1 43.58,28.683 43.753,28.51 R18.2
NetR5_2: R5.2 USB1.A5 | length 13.7
  Top Layer w0.1: R5.2 13.291,3.209 14.691,3.209 14.95,2.95 14.95,1.809 15.009,1.75 18.75,1.75 19.15,2.15 v1(19.15,2.95) ; USB1.A5 19.125,8.145 19.125,6.675 v1(19.15,6.65)
  Bottom Layer w0.1: v1(19.15,2.95) v1(19.15,6.65)
NetR6_2: R6.2 USB1.B5 | length 16.1
  Top Layer w0.1: R6.2 13.45,1.25 22.05,1.25 22.109,1.309 22.109,4.586 22.1,4.595 USB1.B5
NetR8_2: R8.2 U2.6 | length 4.5
  Top Layer w0.254: U2.6 33.293,13.925 33.442,14.074 33.442,14.381 34.158,15.097 34.158,16.158 34.9,16.9 R8.2
NetR9_1: R9.1 U2.8 | length 6.5
  Top Layer w0.254: R9.1 31.7,19.177 32.123,19.6 32.951,19.6 33.177,19.374 33.177,17.026 32.92,16.769 32.92,15.298 32.847,15.225 U2.8
NetR11_2: R11.2 U2.1 | length 2.3
  Top Layer w0.254: U2.1 30.053,15.225 30.2,15.372 R11.2
NetR14_1: R14.1 R15.2 | length 1.8
  Top Layer w0.254: R14.1 R15.2
NetR15_1: R15.1 R16.1 R17.2 | length 12.2
  Top Layer w0.254: R15.1 R16.1 43.35,12.401 43.499,12.55 47.469,12.55 48.25,11.769 48.25,9.75 47.982,9.482 47.282,9.482 R17.2
NRF24_CE: P1.2 U1.4 | length 48.4
  Top Layer w0.254: v1(11.25,46.75) 14.15,46.75 16.1,44.8 U1.4
  Bottom Layer w0.254: v1(11.25,46.75) 11.211,46.711 11.211,46.019 9.65,44.458 9.65,43.342 24.873,28.119 28.573,28.119 36.002,20.69 P1.2
NRF24_CSN: P1.3 U1.5 | length 50.3
  Top Layer w0.254: v1(10.35,46.05) 13.58,46.05 16.1,43.53 U1.5
  Bottom Layer w0.254: v1(10.35,46.05) 9.63,46.05 9.481,45.901 9.481,45.289 9.142,44.95 9.142,43.132 24.663,27.611 28.363,27.611 36.554,19.42 P1.3
NRF24_INT: P1.7 U1.8 | length 63.8
  Top Layer w0.254: v1(6.55,44.75) 7.15,44.75 9.615,42.285 13.426,42.285 15.668,40.043 16.077,40.043 U1.8
  Bottom Layer w0.254: v1(6.55,44.75) 6.55,42.85 23.966,25.434 24.293,25.434 24.442,25.285 24.442,15.03 24.591,14.881 28.855,14.881 29.396,14.34 P1.7
NRF24_MISO: P1.6 U1.9 | length 61.4
  Top Layer w0.254: v1(7.204,43.804) 9.597,41.411 13.582,41.411 15.258,39.734 15.258,38.742 15.418,38.582 16.268,38.582 U1.9
  Bottom Layer w0.254: v1(7.204,43.804) 7.204,42.915 24.176,25.942 24.801,25.942 24.95,25.793 24.95,15.95 25.29,15.61 P1.6
NRF24_MOSI: P1.5 U1.7 | length 62.4
  Top Layer w0.254: v1(7.95,46.25) 7.95,45.559 7.85,45.459 7.85,44.835 8.204,44.481 13.04,44.481 14.55,42.971 14.55,42.05 15.418,41.182 16.208,41.182 U1.7
  Bottom Layer w0.254: v1(7.95,46.25) 7.95,44.042 7.957,44.035 7.957,42.88 24.387,26.45 25.401,26.45 25.55,26.301 25.55,17.029 25.699,16.88 P1.5
NRF24_SCK: P1.4 U1.6 | length 52
  Top Layer w0.254: v1(8.85,45.55) 8.917,45.55 9.117,45.35 13.01,45.35 16.1,42.26 U1.6
  Bottom Layer w0.254: v1(8.85,45.55) 8.85,45.483 8.465,45.099 8.465,43.09 24.505,27.05 28.205,27.05 37.105,18.15 P1.4
PMW_CS: P4.6 U1.18 | length 24.5
  Top Layer w0.254: v1(20.958,27.45) 21.005,27.497 21.133,27.497 21.382,27.746 21.382,29.482 21.768,29.868 21.768,30.643 U1.18
  Bottom Layer w0.254: P4.6 8.373,37.427 8.373,34.307 15.23,27.45 v1(20.958,27.45)
PMW_MISO: P4.3 U1.21 | length 27.1
  Top Layer w0.254: v1(23.811,24.75) 23.85,24.789 23.85,28.138 25.462,29.75 25.462,30.527 U1.21
  Bottom Layer w0.254: P4.3 7.19,31.11 7.19,30.14 9.107,28.223 11.74,28.223 13.813,26.15 22.411,26.15 v1(23.811,24.75)
PMW_MOSI: P4.4 U1.19 | length 22.4
  Top Layer w0.254: v1(21.658,26.781) 21.678,26.781 21.95,27.053 21.95,28.85 22.982,29.882 22.982,30.587 U1.19
  Bottom Layer w0.254: P4.4 8.25,33.85 15.35,26.75 21.627,26.75 v1(21.658,26.781)
PMW_SCK: P4.5 U1.20 | length 34.8
  Top Layer w0.254: v1(22.55,24.85) 22.55,27.556 24.192,29.198 24.192,30.527 U1.20
  Bottom Layer w0.254: P4.5 6.874,36.274 5.964,36.274 5.51,35.82 5.51,28.11 5.905,27.715 11.53,27.715 13.695,25.55 22.178,25.55 22.503,25.225 22.503,24.897 v1(22.55,24.85)
PWM_S0: PWM1.1 U1.39 | length 30.8
  Top Layer w0.254: U1.39 34.888,47.34 34.993,47.34 35.142,47.489 35.142,48.512 35.588,48.958 44.027,48.958 cw(c40.25,40.25) 47.658,46.185 49.64,41.406 49.65,41.345 49.65,33.51 PWM1.1
PWM_S1: PWM2.1 U1.38 | length 30.2
  Top Layer w0.254: U1.38 34.112,46.282 34.882,46.282 35.65,47.05 35.65,48.301 35.799,48.45 43.92,48.45 43.97,48.428 cw(c40.25,40.25) 47.091,46.074 cw(c46.896,45.911) 47.15,45.911 47.15,34.01 PWM2.1
PWM_S2: PWM3.1 U1.35 | length 24.3
  Top Layer w0.254: U1.35 34.223,42.583 34.692,42.583 35.161,43.052 35.161,43.604 35.539,43.982 35.539,44.439 35.95,44.85 38.701,44.85 38.85,44.701 38.85,39.199 38.999,39.05 43.601,39.05 43.75,38.901 43.75,33.65 PWM3.1
PWM_S3: PWM4.1 U1.34 | length 20.2
  Top Layer w0.254: U1.34 34.223,41.313 35.113,41.313 35.669,41.869 35.669,43.35 35.95,43.631 38.001,43.631 38.15,43.482 38.15,38.55 40.35,38.55 40.65,38.25 40.65,33.55 PWM4.1
RXD0: U1.36 UART1.3 | length 18.1
  Top Layer w0.254: U1.36 34.223,43.853 34.692,43.853 35.031,44.192 35.031,44.649 36.132,45.75 44.25,45.75 45.05,44.95 45.05,42.117 43.383,40.45 UART1.3
SD_CLK: J1.5 R21.1 U1.32 | length 22.7
  Top Layer w0.254: U1.32 v1(35.85,38.45)
  Bottom Layer w0.254: J1.5 23.05,35.569 23.199,35.42 29.891,35.42 30.04,35.271 R21.1 30.19,34.23 30.857,33.563 35.013,33.563 35.85,34.4 v1(35.85,38.45)
SD_CMD: J1.3 R20.1 U1.31 | length 15.4
  Top Layer w0.254: U1.31 34.223,37.503 35.293,37.503 v1(35.3,37.51)
  Bottom Layer w0.254: J1.3 25.25,37.1 25.876,36.474 31.741,36.474 31.89,36.325 R20.1 ; R20.1@32.308,34.518 v1(35.3,37.51)
SD_D0: J1.7 R22.1 U1.33 | length 40.2
  Top Layer w0.254: U1.33 33.97,39.65 v1(36.55,39.65)
  Bottom Layer w0.254: J1.7@20.85,38.086 20.85,34.799 20.999,34.65 24.21,34.65 24.63,34.23 ; R22.1 24.63,34.23 ; v1(36.55,39.65) 36.55,28.399 36.357,28.206 29.094,28.206 24.63,32.67 24.63,34.23
TXD0: U1.37 UART1.2 | length 18.2
  Top Layer w0.254: U1.37 34.2,44.8 34.639,45.239 34.808,45.239 36.119,46.55 45.05,46.55 45.69,45.91 UART1.2
USB_DM: R4.1 USB1.A7 USB1.B7 | length 17
  Top Layer w0.1: R4.1 11.05,5.15 11.35,4.85 19.35,4.85 ; USB1.B7 19.6,8.77 19.9,9.07 20.3,9.07 20.6,8.77 USB1.A7 20.554,8.124 20.554,6.054
  Top Layer w0.12: 19.35,4.85 19.365,4.85 20.554,6.039 20.554,6.054
USB_DP: R1.1 USB1.A6 USB1.B6 | length 22.1
  Top Layer w0.1: R1.1 12.85,5.55 13.15,5.25 17.25,5.25 ; v1(17.208,3.092) 18.603,4.486 19.516,4.486 21.1,6.07 USB1.B6 ; v1(17.25,5.75) 17.25,5.25 ; USB1.A6 20.054,8.124 20.054,6.054 19.25,5.25 17.25,5.25
  Bottom Layer w0.1: v1(17.208,3.092) 17.229,3.113 17.229,5.729 v1(17.25,5.75)
VBAT: C6.2 C7.2 D2.A POWER0.4 R8.1 R14.2 U2.2 | length 35.8
  Top Layer w0.254: C7.2 C6.2 29.01,4.8 31.06,6.85 31.462,6.85 31.702,7.09 32.102,7.09 32.304,7.291 32.304,8.064 33.843,9.603 34.328,9.603 D2.A ; v1(28.45,14.25) 28.497,14.297 28.928,14.297 29.133,14.502 29.68,14.502 U2.2 ; D2.A@35.475,10.75 38.45,10.75 ; R8.1 39.05,17.05 39.65,16.45 R14.2 38.55,10.75
  Bottom Layer w0.254: v1(28.45,14.25) 28.45,8.71 30.364,6.796 31.296,6.796 POWER0.4
VBUS: D1.A USB1.A4 USB1.A9 USB1.B4 USB1.B9 | length 23
  Top Layer w0.254: D1.A 9.77,1.87 9.95,2.05 v1(9.95,4.75) ; v1(16.55,10.05) 17.15,10.05 17.8,9.4 17.8,8.793 USB1.A4 ; USB1.A4@17.858,8.793 18.077,8.793 USB1.B9@18.1,8.77 ; USB1.B9 18.1,8.922 18.679,9.501 22.169,9.501 22.9,8.77 USB1.A9
  Bottom Layer w0.254: v1(9.95,4.75) 15.25,10.05 v1(16.55,10.05)
VCC3.3: bmp1.2 bmp1.5 bmp1.6 bmp1.8 C1.2 C2.2 C13.2 C14.2 C16.2 C21.2 C22.1 M1.3 mpu1.8 mpu1.13 P1.1 P2.1 P4.1 Q1.2 R3.1 R13.1 R26.1 R27.2 R28.2 R29.2 U3.2 U3.4 UART1.1 | length 163.9
  Top Layer w0.1: mpu1.8 10.7,16.675 11.025,17 13.025,17 13.325,17.3 mpu1.13
  Top Layer w0.254: v1(4.62,32.4) v1(6.39,32.4) ; P2.1 7.075,13.125 9.8,13.125 9.848,13.173 10.265,13.173 10.819,13.727 11.402,13.727 bmp1.6 ; v1(8.74,29.34) 9.05,29.03 R26.1 11.87,29.03 R27.2 ; v1(9.27,31.79) 9.95,32.47 C2.2 ; C2.2@10.15,34.15 C1.2 R3.1@13.75,34.15 ; mpu1.8 10.7,15.1 11.375,14.425 bmp1.5 bmp1.6 ; bmp1.8 11.498,12.523 12.101,12.523 12.25,12.672 12.25,13.578 12.101,13.727 11.498,13.727 bmp1.6 ; v1(15.75,20.55) 15.75,20.617 16.077,20.944 16.077,21.577 16.5,22 C22.1 C13.2 C14.2 21.9,22 21.477,21.577 21.477,21.277 20.915,20.715 20.915,20.265 C16.2 ; C21.2 C16.2 ; U3.2 U3.4 20.85,19.5 C16.2 ; R13.1@22.2,22 23.577,20.623 35.723,20.623 v1(37.05,21.95) ; R29.2 38.753,28.18 38.983,27.95 v1(39.05,27.95) 40.075,28.975 Q1.2@41.53,28.975 ; R28.2 v1(37.95,25.63) ; v1(42.35,5.45) M1.3@43.45,5.45
  Bottom Layer w0.254: v1(4.62,32.4) 4.62,32.338 4.41,32.128 4.41,27.41 5.47,26.35 P4.1 ; v1(6.39,32.4) 8.66,32.4 v1(9.27,31.79) 9.27,29.87 v1(8.74,29.34) ; P2.1 4.55,15.65 4.55,23.95 P4.1 ; v1(15.75,20.55) 12.75,20.55 P4.1 ; v1(37.05,21.95) 37.055,21.955 38.645,21.955 P1.1 38.65,23.401 ; v1(37.95,25.63) 37.95,26.85 38.65,27.55 ; v1(39.05,27.95) 38.65,27.55 ; v1(42.35,5.45) 42.35,7.45 43.95,9.05 43.95,23.401 ; UART1.1 48.23,39.209 49.581,37.858 49.581,27.831 45.151,23.401 43.95,23.401 ; 38.65,23.401 43.95,23.401 ; 38.65,23.401 38.65,27.55
VCC5: C4.2 C9.2 C10.2 C11.2 C12.2 C24.2 D1.C L1.2 R10.2 U3.3 | length 46.7
  Top Layer w0.254: C12.2 C12.2@3.2,7.4 ; C4.2 4.5,5.4 3.623,6.277 3.623,6.977 C12.2@3.2,7.4 ; D1.C 8.25,7.2 C9.2 ; v1(9.95,5.85) 9.903,5.897 9.903,6.097 8.6,7.4 C9.2 ; U3.3 23.285,11.05 v1(25.45,11.05) 25.45,11.117 25.7,11.367 L1.2 25.7,14.614 26.195,15.11 26.195,15.26 R10.2@25.65,15.26 ; R10.2 23.349,15.25 23.2,15.399 23.2,18.801 23.349,18.95 C24.2 26.25,18.95 ; C12.2@3.2,7.4 C11.2 C10.2 C9.2
  Bottom Layer w0.254: v1(9.95,5.85) 15.15,11.05 v1(25.45,11.05)
pads on no net: BOOT1.2 BOOT1.4 J1.0 J1.1 J1.2 J1.8 M1.9 mpu1.0 mpu1.2 mpu1.3 mpu1.4 mpu1.5 mpu1.14 mpu1.15 mpu1.16 mpu1.17 mpu1.19 mpu1.21 mpu1.22 POWER0.2 POWER0.3 PWM1.2 PWM2.2 PWM3.2 PWM4.2 RST1.2 RST1.4 U1.28 U1.29 U1.30 U1.41_10 U1.41_11 U1.41_12 U1.41_13 U1.41_14 U1.41_15 U1.41_16 U1.41_17 U1.41_18 U1.41_19 U1.41_20 U1.41_21 USB1.0 USB1.A8 USB1.B8

## Polygon pours and split planes (outlines as drawn)
GND on Bottom Layer "NONET_L02_P003" (solid, remove dead copper, shelved, pour order 3): 0,52.1 49.8,52.1 50,52.3 50.2,52.1 50.2,0 0,0

## Keep-outs
Keep-Out Layer:
  lines w0.1: 50.25,20.4 50.25,40.32 ; 50.25,40.35 ccw(c40.45,40.45) 40.55,50.25 10.85,50.25 ccw(c10.1,40.5) 0.35,41.25 0.351,10.015 ccw(c10.062,9.962) 10.009,0.251 40.74,0.25 ccw(c40.476,10.026) 50.251,10.29 50.251,20.4

## Silkscreen, mask and mechanical layers (free items; w line width, h text height)
Mechanical 1:
  lines w0.1: 50.25,10.25 cw(c40.25,10.25) 40.25,0.25 10.25,0.25 cw(c10.25,10.25) 0.25,10.25 0.25,40.25 cw(c10.25,40.25) 10.25,50.25 40.25,50.25 cw(c40.25,40.25) 50.25,40.25 50.25,20.44 ; 50.26,10.252 50.26,20.44

## Text inside footprints (layer, text, board x,y; h text height)
U1: Mechanical 13 "ANTENNA" at 20.65,52.85 h1.27